# Altium PCB ParentBoardV2.PcbDoc
Units mil, origin at the board's own origin, x right, y up, seen from the top; angles counter-clockwise.
Board outline 2200 x 1700 mil, 2 copper layers (Top Layer, Bottom Layer); 37 components, 28 nets, 146 pads, 38 vias.
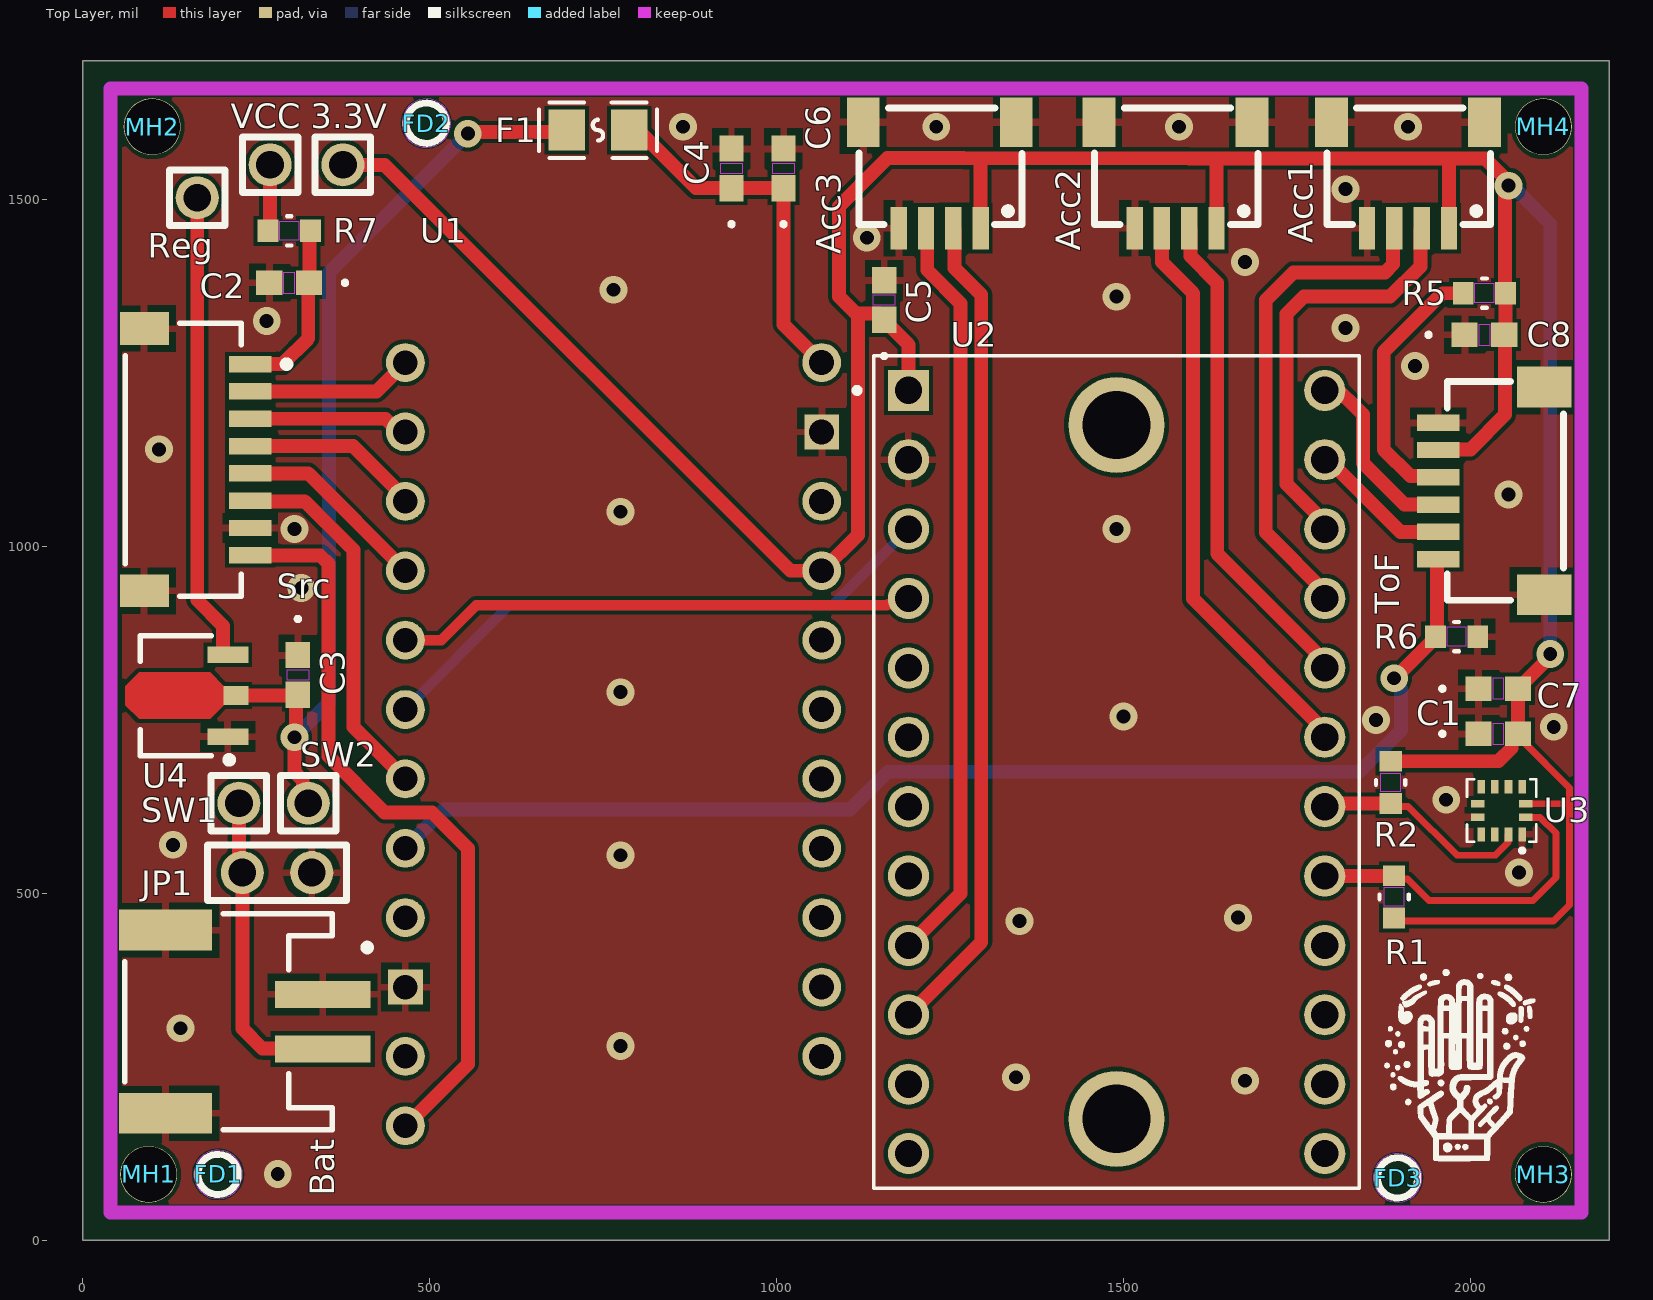
[diagram p0: Top Layer view]
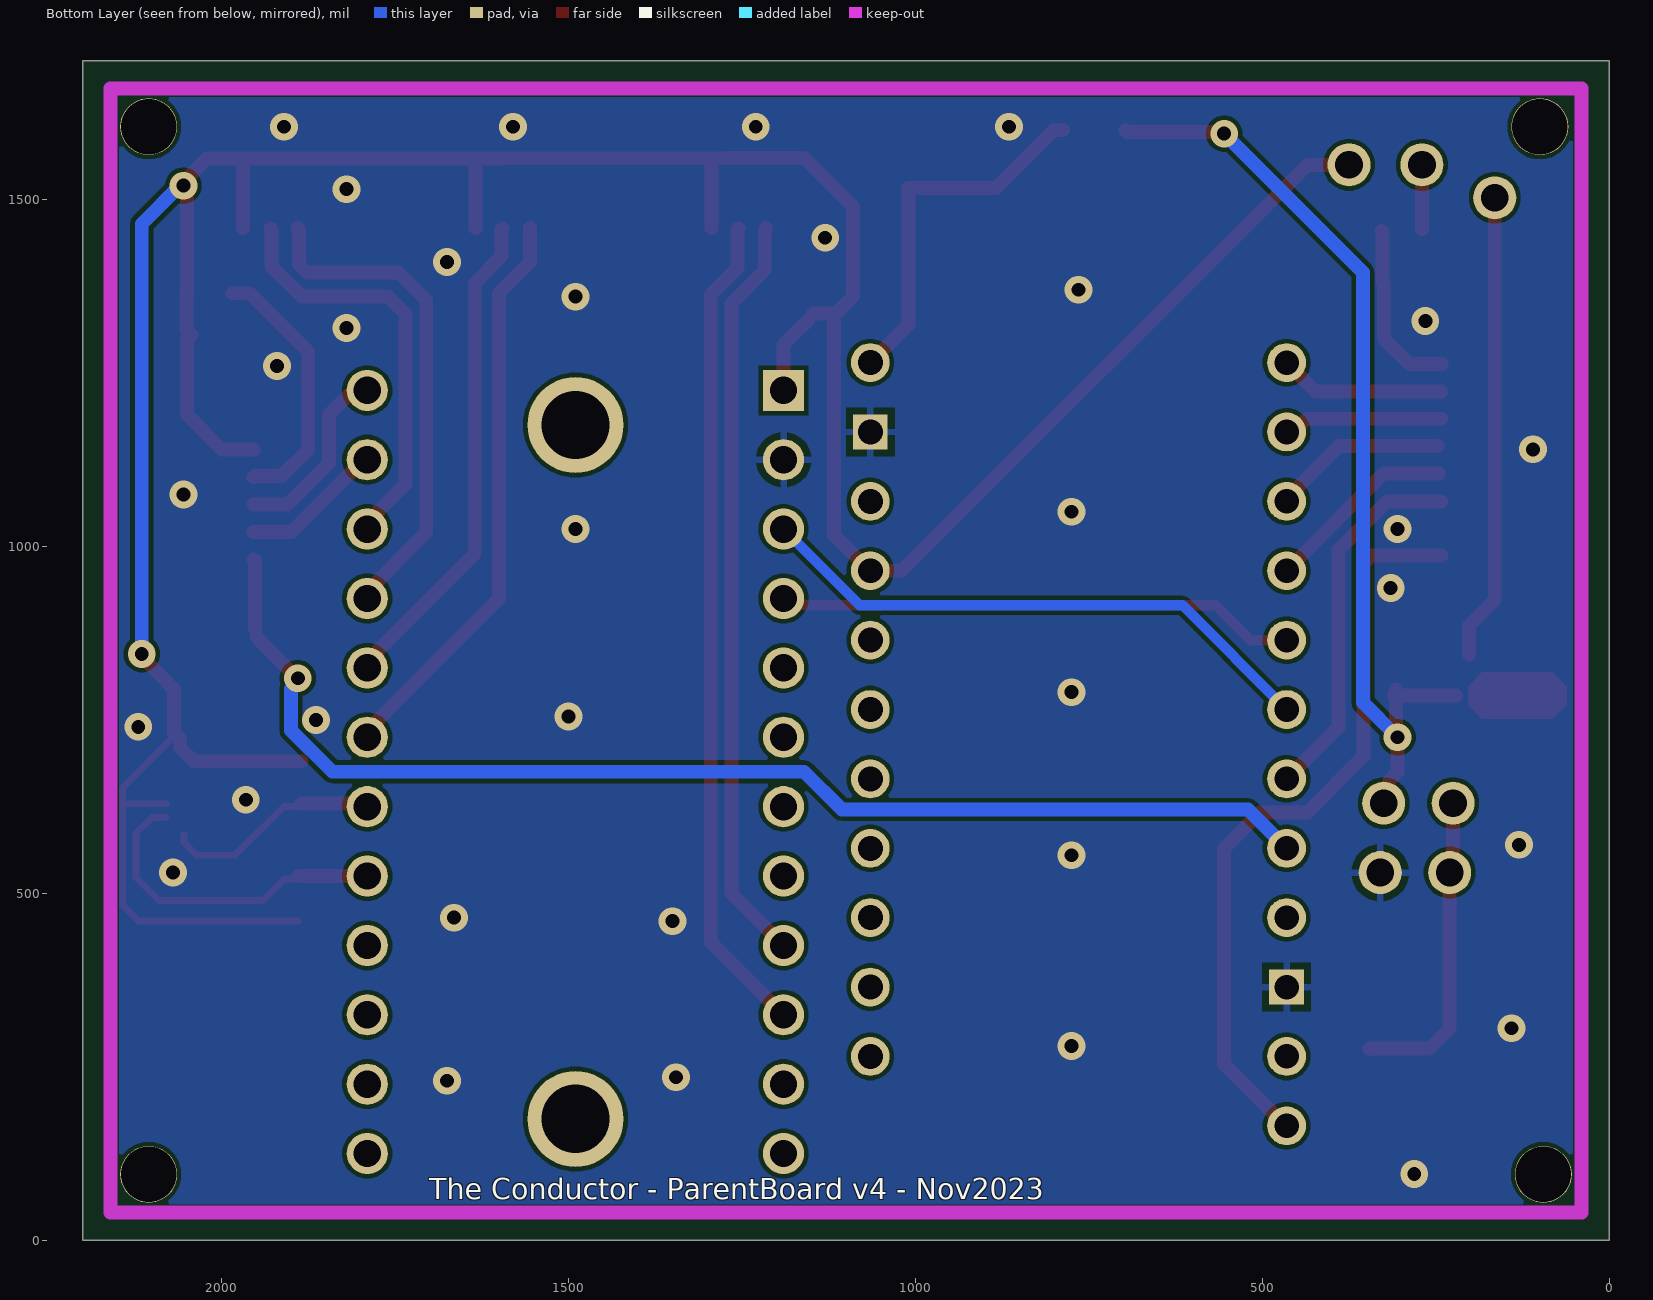
[diagram p1: Bottom Layer view, seen from below]
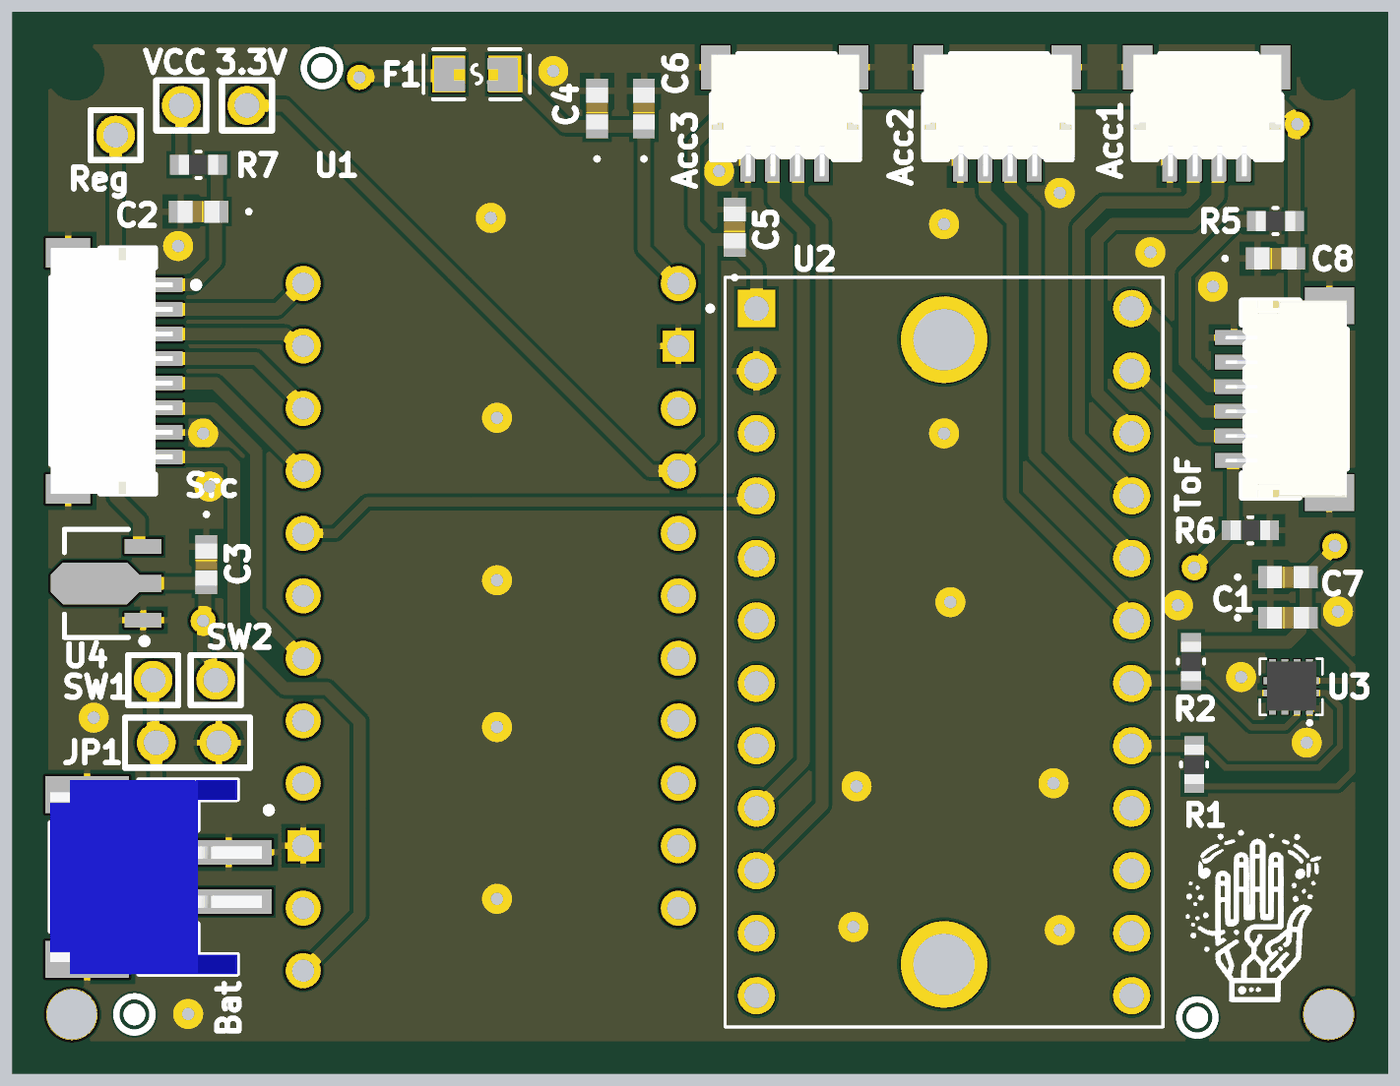
[diagram p2: 3D render of the assembled board from above, using the file's embedded part models]

## Layer stack, top to bottom
Top Solder: solder mask 0.4, Solder Resist, Dk 3.5
Top Layer: signal copper 1.4
Dielectric 1: dielectric 12.6, FR-4, Dk 4.8
Bottom Layer: signal copper 1.4
Bottom Solder: solder mask 0.4, Solder Resist, Dk 3.5

## Board outline
0,0 0,1700 2200,1700 2200,0

## Design rules (kind name [scope] priority, off if disabled: settings)
Clearance Clearance_Keepout [IsKeepOut] p1: gap=2 ignorepadtopadclearanceinfootprint=FALSE
Clearance [All] p2: gap=6 ignorepadtopadclearanceinfootprint=FALSE
MinimumSolderMaskSliver MinimumSolderMaskSliver_ToPad [IsPad] p1: minsoldermaskwidth=4
MinimumSolderMaskSliver [All] p2: minsoldermaskwidth=6
PolygonConnect "GND VIA" [InNet('GND') vs IsVia] p1: connectstyle=Direct reliefconductorwidth=10 reliefentries=4 polygonreliefangle="90 Angle" airgapwidth=10
PolygonConnect [All] p2: connectstyle=Relief reliefconductorwidth=10 reliefentries=4 polygonreliefangle="90 Angle" airgapwidth=10
RoutingVias [All] p1: holewidth=28 width=50 viastyle="Through Hole" minholewidth=5.12 minwidth=10.24 maxholewidth=28 maxwidth=50
SilkToSilkClearance [All] p1: silktosilkclearance=2
SilkToSolderMaskClearance [IsPad] p1: minsilkscreentomaskgap=2 clearancetoexposedcopper=TRUE
SolderMaskExpansion [All] p1: expansion=4 istentingtop=FALSE
Width [All] p1: maxlimit=20 minlimit=5 preferedwidth=20
27 further rules are at their usual default settings.

## Components (designator, comment, footprint, x,y, rotation, side; value= is the part's Value field where it differs from the comment)
3.3V "HOLE 1" RAD0.1C 375,1550 r90 top
Acc1 "SM04B-SRSS" CONN-SMD_4P-P1.00_SM04B-SRSS-TB-LF-SN 1910,1535 r180 top
Acc2 "SM04B-SRSS" CONN-SMD_4P-P1.00_SM04B-SRSS-TB-LF-SN 1575,1535 r180 top
Acc3 "SM04B-SRSS" CONN-SMD_4P-P1.00_SM04B-SRSS-TB-LF-SN 1235,1535 r180 top
Bat "CN-1P-2M-R2" "JST- S2B-PH-SM4-TB(LF)(SN)-2_V" 210,315 r270 top
C1 "0.1uF" CAP_AMK107BJ475MK-T_TAY 2040,730 r0 top
C2 "1uF" CAP_AMK107BJ475MK-T_TAY 297.5,1380 r180 top
C3 "1uF" CAP_AMK107BJ475MK-T_TAY 310,815 r270 top
C4 "0.1uF" CAP_AMK107BJ475MK-T_TAY 935,1545 r90 top
C5 "0.1uF" CAP_AMK107BJ475MK-T_TAY 1155,1355 r90 top
C6 "0.1uF" CAP_AMK107BJ475MK-T_TAY 1010,1545 r90 top
C7 "0.1uF" CAP_AMK107BJ475MK-T_TAY 2040,795 r0 top
C8 "0.1uF" CAP_AMK107BJ475MK-T_TAY 2020,1305 r0 top
F1 "Resettable Fuse" F0805 742.5,1600 r180 top
FD1 "FID1X2R" Fiducial 195,95 r0 top
FD2 "FID1X2R" Fiducial 495,1610 r0 top
FD3 "FID1X2R" Fiducial 1895,90 r0 top
JP1 "Battery" RAD0.1 330,530 r90 top
MH1 "Mount-Hole" "support 2 mm" -82,920 r0 top
MH2 "Mount-Hole" "support 2 mm" -77,2430 r0 top
MH3 "Mount-Hole" "support 2 mm" 1928,920 r0 top
MH4 "Mount-Hole" "support 2 mm" 1928,2430 r0 top
R1 "4.7K" RC0603N_YAG 1890,495 r90 top
R2 "4.7K" RC0603N_YAG 1885,660 r270 top
R5 "2.7K" RC0603N_YAG 2020,1365 r0 top
R6 "2.7K" RC0603N_YAG 1980,870 r0 top
R7 "2.7K" RC0603N_YAG 297.5,1455 r180 top
Reg "HOLE 1" RAD0.1C 165,1502.5 r270 top
Src "SM08B-SRSS-TB(LF)(SN)" JST-SM08B-SRSS-TB_V 145,1125 r270 top
SW1 "HOLE 1" RAD0.1C 225,630 r90 top
SW2 "HOLE 1" RAD0.1C 325,630 r0 top
ToF "ToF sensor connector" CONN-SMD_SM06B-SRSS-TB-LF-SN 2030,1080 r90 top
U1 "TinyS3" TinyS3 760.67,716.34 r0 top
U2 "I2C Expander" MODULE_2717 1490,675 r0 top
U3 "Acc4" LGA-12_L2.0-W2.0-P0.50-BL 2045,620 r180 top
U4 "Regulator" SOT89-150P350X160-3N 150,785 r180 top
VCC "HOLE 1" RAD0.1C 270,1550 r0 top

## Footprints (in the part's own frame and the unit in brackets; to place one, negate y for a bottom-side part, rotate by r counter-clockwise, add the part's x,y. Pads: shape width x height; smd on the part's side, far side on the other; paste and mask are expansions set on the pad)
CAP_AMK107BJ475MK-T_TAY [mil]
  rect 38x35 smd paste+0 mask+0: 1(-28.5,0) 2(28.5,0)
  Top Layer keep-out region: -7.5,-15.5 -7.5,15.5 7.5,15.5 7.5,-15.5
  silkscreen extent -83,-3 -78,3, body extent -34,-17 34,17, height 20
CONN-SMD_4P-P1.00_SM04B-SRSS-TB-LF-SN [mm]
  rect 0.6x1.55 smd paste+0 mask+0.051: 1(-1.5,1.938) 2(-0.5,1.938) 3(0.501,1.938) 4(1.5,1.938)
  rect 1.2x1.8 smd paste+0 mask+0.051: 5(2.8,-1.938) 6(-2.8,-1.938)
  silkscreen extent -3.02,-2.46 2.96,1.8, body extent -3.03,-2.45 2.97,2.5, height 3.28
CONN-SMD_SM06B-SRSS-TB-LF-SN [mm]
  rect 0.6x1.55 smd paste+0 mask+0.051: 1(-2.5,1.938) 2(-1.5,1.938) 3(-0.5,1.938) 4(0.5,1.938) 5(1.5,1.938) 6(2.5,1.938)
  rect 1.5x2 smd paste+0 mask+0.051: 7(3.8,-1.938) 8(-3.8,-1.938)
  silkscreen extent -4,-2.64 4,1.61, body extent -4,-2.65 4,2.3, height 2.97
F0805 [mm]
  rect 1.335x1.5 smd paste-100 mask+0.051: 1(-1.142,0) 2(1.142,0)
  silkscreen extent -2.16,-1.02 2.16,1.02
Fiducial [mil]
  round 35 on Top Overlay paste+0: ""(0,0)
  Top Layer keep-out circle w0.4: c0,0 r35
  silkscreen extent -29,-29 29,29
"JST- S2B-PH-SM4-TB(LF)(SN)-2_V" [mm] "SMD, 2-Leads, Body 7.9x7.6mm, Pitch 2mm"
  rect 1x3.5 smd: 1(-1,3.45) 2(1,3.45)
  rect 1.5x3.4 smd: MP1(-3.35,-2.3) MP2(3.35,-2.3)
  silkscreen extent -3.95,-3.8 3.95,5.21, body extent -3.95,-3.8 3.95,4.8, height 5.6
JST-SM08B-SRSS-TB_V [mm] "SMD, 8-Leads, Body 10x4.25mm, Pitch 1mm"
  rect 0.6x1.55 smd: 1(-3.5,2.45) 2(-2.5,2.45) 3(-1.5,2.45) 4(-0.5,2.45) 5(0.5,2.45) 6(1.5,2.45) 7(2.5,2.45) 8(3.5,2.45)
  rect 1.2x1.8 smd: MP1(-4.8,-1.425) MP2(4.8,-1.425)
  silkscreen extent -5,-2.12 5,3.9, body extent -5,-2.12 5,2.83, height 2.96
LGA-12_L2.0-W2.0-P0.50-BL [mm]
  rect 0.28x0.5 smd paste+0 mask+0.051: 1(-0.75,0.892) 4(-0.75,-0.858) 5(-0.25,-0.858) 6(0.25,-0.858) 7(0.75,-0.858) 10(0.75,0.892) 11(0.25,0.892) 12(-0.25,0.892)
  rect 0.5x0.28 smd paste+0 mask+0.051: 2(-0.875,0.267) 3(-0.875,-0.233) 8(0.875,-0.233) 9(0.875,0.267)
  silkscreen extent -1.27,-1.13 1.27,1.56, body extent -1.02,-1.01 0.98,0.99, height 0.92
MODULE_2717 [mm]
  rect 1.508x1.508 hole 1 mask+0.05: 1(-7.62,13.97)
  round 1.508 hole 1 mask+0.05: 2(-7.62,11.43) 3(-7.62,8.89) 4(-7.62,6.35) 5(-7.62,3.81) 6(-7.62,1.27) 7(-7.62,-1.27) 8(-7.62,-3.81) 9(-7.62,-6.35) 10(-7.62,-8.89) 11(-7.62,-11.43) 12(-7.62,-13.97) 13(7.62,-13.97) 14(7.62,-11.43) 15(7.62,-8.89) 16(7.62,-6.35) 17(7.62,-3.81) 18(7.62,-1.27) 19(7.62,1.27) 20(7.62,3.81) 21(7.62,6.35) 22(7.62,8.89) 23(7.62,11.43) 24(7.62,13.97)
  round 3.516 hole 2.5 mask+0.05: P1(0,12.7) P2(0,-12.7)
  silkscreen extent -9.6,-15.24 8.89,15.24
RAD0.1 [mil]
  round 62 hole 40: 1(0,0) 2(0,100)
  silkscreen extent -40,-50 40,150
RAD0.1C [mil]
  round 62 hole 40: 1(0,0)
  silkscreen extent -40,-40 40,40
RC0603N_YAG [mil]
  rect 30x32 smd paste+0 mask+0: 1(-30.5,0) 2(30.5,0)
  Top Layer keep-out region: -13.5,-14 -13.5,14 13.5,14 13.5,-14
  silkscreen extent -3,-21 3,21, body extent -31,-16 31,16, height 28
SOT89-150P350X160-3N [mm] "SOT89, 3-Leads, Body 4.50x2.45mm, Pitch 1.50mm, Lead Span 3.5mm, IPC Medium Density"
  rect 1.5x0.6 smd: 1(-1.5,1.5) 3(-1.5,-1.5)
  rect 0.9x0.7 smd: 2(-1.8,0)
  Top Layer region: -1.35,0.35 -0.85,0.85 1.75,0.85 2.25,0.35 2.25,-0.35 1.75,-0.85 -0.85,-0.85 -1.35,-0.35
  silkscreen extent -1.68,-2.2 1.7,2.47, body extent -0.9,-2.2 1.7,2.2, height 1.6
"support 2 mm" [mil]
  round 82 hole 80 unplated: 2mm(177,-825)
TinyS3 [mil]
  round 56 hole 35.43: 1(-295.67,548.66) 2(-295.67,448.66) 3(-295.67,348.66) 4(-295.67,248.66) 5(-295.67,148.66) 6(-295.67,48.66) 7(-295.67,-51.34) 8(-295.67,-151.34) 9(-295.67,-251.34) 11(-295.67,-451.34) 12(-295.67,-551.34)
  rect 50x50 hole 35.43: 10(-295.67,-351.34)
  round 56 hole 36: 13(304.33,-451.34) 14(304.33,-351.34) 15(304.33,-251.34) 16(304.33,-151.34) 17(304.33,-51.34) 18(304.33,48.66) 19(304.33,148.66) 20(304.33,248.66) 21(304.33,348.66) 23(304.33,548.66)
  rect 50x50 hole 36: 22(304.33,448.66)

## Part data
Acc1 Acc2 Acc3: library part "SM04B-SRSS-TB (LF)(SN)", "4 pin JST connector", JLCPCB Part Class="Extended Part", LCSC PART #=C160404, Manufacturer=JST, Manufacturer Part=SM04B-SRSS-TB(LF)(SN), Contributor=LCSC, spicePre=C, spiceSymbolName="SM04B-SRSS-TB (LF)(SN)", Supplier=LCSC, Supplier Part=C160404
Bat: "2 pin connector SMT 2 mm pitch", LCSC PART #=C295747
C1 C4 C5 C6 C7 C8: library part CL10B104KB8NNNC, "SMT Capacitor 0.1 uF", LCSC PART #=C1591, Manufacturer_Part_Number=AMK107BJ475MK-T, Mfr_Name="Taiyo Yuden", Copyright="Copyright (C) 2023 Ultra Librarian. All rights reserved.", Digi-Key_Part_Number_1=587-2228-1-ND, Digi-Key_Part_Number_2=587-2228-2-ND, Digi-Key_Part_Number_3=587-2228-6-ND, RefDes=RefDes, Type=DEV
C2 C3: library part CL10B105KQ8NNNC, "SMT Capacitor 1 uF", LCSC PART #=C105524, Manufacturer_Part_Number=AMK107BJ475MK-T, Mfr_Name="Taiyo Yuden", Copyright="Copyright (C) 2023 Ultra Librarian. All rights reserved.", Digi-Key_Part_Number_1=587-2228-1-ND, Digi-Key_Part_Number_2=587-2228-2-ND, Digi-Key_Part_Number_3=587-2228-6-ND, RefDes=RefDes, Type=DEV
F1: library part 0805L035YR, "6V 350mA 100A 750mA 0805 Resettable Fuses ROHS", JLCPCB Part Class="Extended Part", LCSC PART #=C2687882, Manufacturer=Littelfuse(美国力特), Contributor=LCSC, Manufacturer Part=0805L035YR, spicePre=F, spiceSymbolName=0805L035YR, Supplier=LCSC, Supplier Part=C207021
FD1 FD2 FD3: "Fiducial - Round 1x2mm"
JP1: library part "HOLE 2"
MH1 MH2 MH3 MH4: library part "MountHoles 2 mm", "Mount hole", LatestRevisionDate=17-Jul-2002, LatestRevisionNote="Re-released for DXP Platform.", Publisher="Altium Limited"
R1 R2: library part RC0603JR-074K7L, "SMT Resitor 4.7k", LCSC PART #=C105428, Manufacturer_Part_Number=RC0603JR-072K7L, Mfr_Name=Yageo, Copyright="Copyright (C) 2023 Ultra Librarian. All rights reserved.", Digi-Key_Part_Number_1=311-2.7KGRCT-ND, Digi-Key_Part_Number_2=311-2.7KGRDKR-ND, Digi-Key_Part_Number_3=311-2.7KGRTR-ND, Digi-Key_Part_Number_4=311-2.7KGRTR-NDL, RefDes=RefDes, Type=DEV
R5 R6 R7: library part RC0603JR-072K7L, "SMT Resitor 2.7k", LCSC PART #=C127451, Mfr_Name=Yageo, Copyright="Copyright (C) 2023 Ultra Librarian. All rights reserved.", Digi-Key_Part_Number_1=311-2.7KGRCT-ND, Digi-Key_Part_Number_2=311-2.7KGRDKR-ND, Digi-Key_Part_Number_3=311-2.7KGRTR-ND, Digi-Key_Part_Number_4=311-2.7KGRTR-NDL, Manufacturer_Part_Number=RC0603JR-072K7L, RefDes=RefDes, Type=DEV
Src: library part CMP-2000-07082-1, "Male Header, Pitch 1 mm, 1 x 8 Position, Height 2.95 mm, -25 to 85 degC, RoHS, Tape and Reel", LCSC PART #=C160407, Manufacturer=JST, Package Description="Male Header, Pitch 1 mm, 1 x 8 Position, Height 2.95 mm", Package Reference=SM08B-SRSS-TB, Datasheet URL=http://www.jst-mfg.com/product/pdf/eng/eSR.pdf, Datasheet Version=11/2010, Manufacturer URL=http://www.jst.com/home2.html, Mounting Technology=SurfaceMount, No of Positions=8, Pitch=1mm, Style/Orientation=RightAngleHeader/Plug, Termination=Crimp, Type=ShroudedHeader
ToF: library part SM06B-SRSS-TB(LF)(SN), "6 pin connector", JLCPCB Part Class="Extended Part", LCSC PART #=C160405, Manufacturer=JST, Contributor=LCSC, Manufacturer Part=SM06B-SRSS-TB(LF)(SN), spicePre=U, spiceSymbolName=SM06B-SRSS-TB(LF)(SN), Supplier=LCSC, Supplier Part=C160405
U1: library part TinyS3_1, "TinyS3_1"
U3: library part MC3416-P, "VLGA-12 Attitude Sensor/Gyroscope ROHS", LCSC PART #=MC3416-P
U4: library part AP7380-33Y-13, "Fixed 24V 3.3V 1.5V @ 150mA SOT-89-3 Linear Voltage Regulators (LDO) RoHS", JLCPCB Part Class="Extended Part", LCSC PART #=C115096, Manufacturer=DIODES(美台), Contributor=LCSC, Manufacturer Part=AP7380-33Y-13, spicePre=U, spiceSymbolName=AP7380-33Y-13, Supplier=LCSC, Supplier Part=C115096

## Via types
v1: diameter 40, hole 20, Top Layer to Bottom Layer, 38 vias

## Nets (pads, with @x,y where several pads share a name; then routed paths per layer and width w, separated by ;. In a path a pad name is that pad's centre, name@x,y a point inside that pad or via, vN(x,y) a via of type N, cw(c..) or ccw(c..) an arc to the next point about the centre after c; other vN are vias at no path point)
+3.3V: 3.3V.1 Acc1.1 Acc2.1 Acc3.1 C1.2 C5.1 C7.2 C8.2 R1.1 R2.1 R5.2 ToF.5 U1.20 U2.1 U3.3 | length 5045.8
  Top Layer w10: R1.1@1890,460 2119.64,460 2143,483.36 2143,630 ; C1.2@2075,720 2143,652 2143,630 ; U3.3 2142.16,629.16 2143,630
  Top Layer w20: 3.3V.1 435,1550 1020,965 U1.20 ; U1.20@1065.58,965 1117.33,1016.75 1117.33,1332.67 1114.5,1335.5 ; C5.1@1147.5,1335.5 1114.5,1335.5 ; C5.1 1155,1325 1162.5,1317.5 1163.28,1317.5 1190,1290.78 U2.1 ; Acc3.1 1294.05,1558.48 1295,1559.43 ; 1594.68,1559.16 1630,1559.16 ; 1594.68,1559.43 1295,1559.43 ; Acc2.1 1634.05,1555.11 1630,1559.16 ; R2.1 2040.47,690.5 2059.5,709.53 2059.5,722.5 2066.47,729.47 C1.2@2067.97,729.47 ; ToF.5 1954.66,1140 2000,1140 2050,1190 2050,1298.5 2043.5,1305 2050.38,1311.88 R5.2@2050.38,1364.88 ; ToF.5@1955.34,1140.87 ToF.5@1955.44,1140.78 ; Acc1.1 1969.05,1558.2 1970,1559.16 ; R5.2@2050,1365 v1@2050,1520 ; v1(2055,1520) 2055,1525 2020.84,1559.16 1970,1559.16 ; C1.2 C7.2 2070,795 2077.5,802.5 2077.5,804 2115,841.5 v1(2115,845) ; 1114.5,1335.5 1090,1360 1090,1490 1159.85,1559.85 1269.02,1559.85 1269.43,1559.43 1295,1559.43 ; 1630,1559.16 1970,1559.16
  Bottom Layer w20: v1(2055,1520) 2060,1520 2115,1465 v1(2115,845)
Bat: Bat.2 JP1.2 SW1.1 | length 455.1
  Top Layer w20: SW1.1 225,535 JP1.2 230,305 258.64,276.36 345.1,276.36 Bat.2
CS/SS: Src.5 U1.4 | length 278
  Top Layer w20: Src.5@244.97,1105 325,1105 U1.4
DC/RS: Src.8 U1.12 | length 1082.9
  Top Layer w20: Src.8 342.28,987.2 354,975.49 354,697.77 435.11,616.66 503.34,616.66 555,565 555,254.33 U1.12@469.33,168.66
GND: Acc1.4 Acc1.5 Acc1.6 Acc2.4 Acc2.5 Acc2.6 Acc3.4 Acc3.5 Acc3.6 Bat.1 Bat.MP1 Bat.MP2 C1.1 C2.2 C3.1 C4.2 C5.2 C6.2 C7.1 C8.1 JP1.1 R6.2 Src.7 Src.MP1 Src.MP2 ToF.6 ToF.7 ToF.8 U1.10 U1.22 U2.2 U3.1 U3.9 U4.1
  other v1: 280.97,95.71 1675,230 1345,235 775,280 140.97,305.71 1350,460 1665,465 2070,530 775,555 130,570 1965,635 2120,740 1864,749.91 1500,755 775,790 315,940 305,1025 1490,1025 775,1050 2055,1075 110,1140 1920,1260 1820,1315 265,1325 1490,1360 765,1370 1675,1410 1130,1445 1820,1515 865,1605 1230,1605 1580,1605 1910,1605
"IO6-ToF Pull-down": R6.1 ToF.1 U1.8 | length 1763.8
  Top Layer w20: v1(1890,810) 1890.5,810 1944.5,864 1944.5,865 R6.1 ; R6.1@1951.91,882.72 1951.91,979.76 ToF.1
  Bottom Layer w20: U1.8@469.33,568.66 469.33,569.3 494.74,594.72 494.74,595 520.4,620.66 1105.66,620.66 1160.31,675.31 1840.31,675.31 1900,735 1900,794.59 1890,804.59 v1(1890,810)
MISO: Src.3 U1.2 | length 231.4
  Top Layer w20: Src.3 436.2,1184.06 455.26,1165 U1.2
MOSI: Src.2 U1.1 | length 240.8
  Top Layer w20: Src.2 423.43,1223.43 U1.1
NetC2_1: C2.1 R7.1 Src.1 | length 254.8
  Top Layer w20: Src.1 287.8,1262.8 325,1300 C2.1@325,1380 ; C2.1 327,1381 327,1454 R7.1
NetC4_1: C4.1 C6.1 F1.1 U1.23 | length 530.7
  Top Layer w20: F1.1 800,1600 883.5,1516.5 C4.1 C6.1 ; C6.1@1010,1515.78 1010,1320 U1.23
NetR7_2: R7.2 VCC.1 | length 92.8
  Top Layer w20: R7.2@270,1457.17 VCC.1
Reg: Reg.1 U4.3 | length 683.5
  Top Layer w20: Reg.1@170,1510 170,1507.5 Reg.1 165,923.03 202.35,885.68 U4.3@202.35,844.06
RST: Src.6 U1.7 | length 538.6
  Top Layer w20: Src.6@241.47,1065 320,1065 390,995 390,740 U1.7
SC0: Acc3.2 U2.10 | length 1186.8
  Top Layer w20: U2.10@1195,330 1295,430 1295,1362.74 1256.49,1401.25 1256.49,1456.89 Acc3.2
SC4: Acc2.2 U2.20 | length 711.7
  Top Layer w20: Acc2.2 1596.49,1456.89 1596.49,1418.51 1635,1380 1635,990 U2.20@1795,830
SC5: Acc1.2 U2.22 | length 606.9
  Top Layer w20: U2.22@1795,1030 1735,1090 1735,1335 1760,1360 1884.19,1360 1927.86,1403.67 1927.86,1456.89 Acc1.2
SC6: ToF.3 U2.24 | length 267.1
  Top Layer w20: U2.24@1800,1235 1845,1190 1845,1120 1904.68,1060.32 ToF.3
SC7: R2.2 U2.18 U3.12 | length 316.5
  Top Layer w10: R2.2 1889.14,625.36 1910.14,625.36 1980.5,555 2036.2,555 2054.33,573.14 2054.33,584.36 U3.12
  Top Layer w20: U2.18 1794.5,629.5 R2.2
SCL: U1.5 U2.4 | length 749.9
  Top Layer w15: U1.5 516.8,865 566.8,915 1159.03,915 1160.54,916.51 1181.51,916.51 U2.4
SCLK: Src.4 U1.3 | length 254.9
  Top Layer w20: Src.4@247.6,1145 389.33,1145 U1.3@469.33,1065
SD0: Acc3.3 U2.9 | length 1078.3
  Top Layer w20: U2.9@1195,430 1265,500 1265,1350.31 1217.11,1398.21 1217.11,1456.91 Acc3.3
SD4: Acc2.3 U2.19 | length 828
  Top Layer w20: Acc2.3 1555.3,1409.7 1600,1365 1600,925 U2.19@1795,730
SD5: Acc1.3 U2.21 | length 719.9
  Top Layer w20: U2.21@1795,930 1705,1020 1705,1355 1745,1395 1876.77,1395 1888.48,1406.72 1888.48,1456.91 Acc1.3
SD6: ToF.2 U2.23 | length 205.4
  Top Layer w20: U2.23@1792.5,1127.5 1899.05,1020.95 ToF.2
SD7: R1.2 U2.17 U3.2 | length 475.7
  Top Layer w10: R1.2@1890,520.5 1909.5,520.5 1940,490 2090,490 2123,523 2123,587 2100.52,609.48 U3.2
  Top Layer w20: U2.17 R1.2@1889.5,525
SDA: U1.6 U2.3 | length 832.7
  Bottom Layer w15: U1.6 615,915 1080,915 U2.3
"ToF Pull-up": R5.1 ToF.4 | length 380.1
  Top Layer w20: ToF.4 1951.91,1101.5 1913.5,1101.5 1875,1140 1875,1280 1960,1365 R5.1@1984.5,1365
Vbat: C3.2 F1.2 SW2.1 U4.2 | length 1381.2
  Top Layer w20: U4.2 308.5,785 C3.2 ; C3.2@307.5,794 307.5,727.5 v1(305,725) 305,675 316.96,663.04 316.96,638.04 SW2.1 ; v1(555,1595) 557.5,1597.5 695.02,1597.5 F1.2
  Bottom Layer w20: v1(305,725) 355,775 355,1395 v1(555,1595)
pads on no net: FD1. FD2. FD3. MH1.2mm MH2.2mm MH3.2mm MH4.2mm U1.9 U1.11 U1.13 U1.14 U1.15 U1.16 U1.17 U1.18 U1.19 U1.21 U2.5 U2.6 U2.7 U2.8 U2.11 U2.12 U2.13 U2.14 U2.15 U2.16 U2.P1 U2.P2 U3.4 U3.5 U3.6 U3.7 U3.8 U3.10 U3.11

## Polygon pours and split planes (outlines as drawn)
GND on Bottom Layer "GND_L02_P001" (solid, remove dead copper, pour order 1): 45,1655 2155,1655 2155,45 45,45 40,50
GND on Top Layer "GND_L01_P000" (solid, remove dead copper, pour order 0): 57.11,1655.3 2157.11,1655.3 2157.11,45.3 52.11,45.3 57.11,50.3 57.11,1660.3

## Keep-outs
Keep-Out Layer:
  lines w20: 40,40 2160,40 2160,1660 40,1660 40,40

## Silkscreen, mask and mechanical layers (free items; w line width, h text height)
Top Overlay:
  drawing of 37 lines, arcs and shapes, not listed
Bottom Overlay:
  text "The Conductor - ParentBoard v4 - Nov2023" at 1701,59 h30

## Text inside footprints (layer, text, board x,y; h text height)
U1: Mechanical 6 "USB" at 675.06,1257.68 h59.06; Mechanical 6 "ANTENNA" at 828.77,119.89 h35.43